# EAGLE board LinPsuv4 (EAGLE 7.5.0)
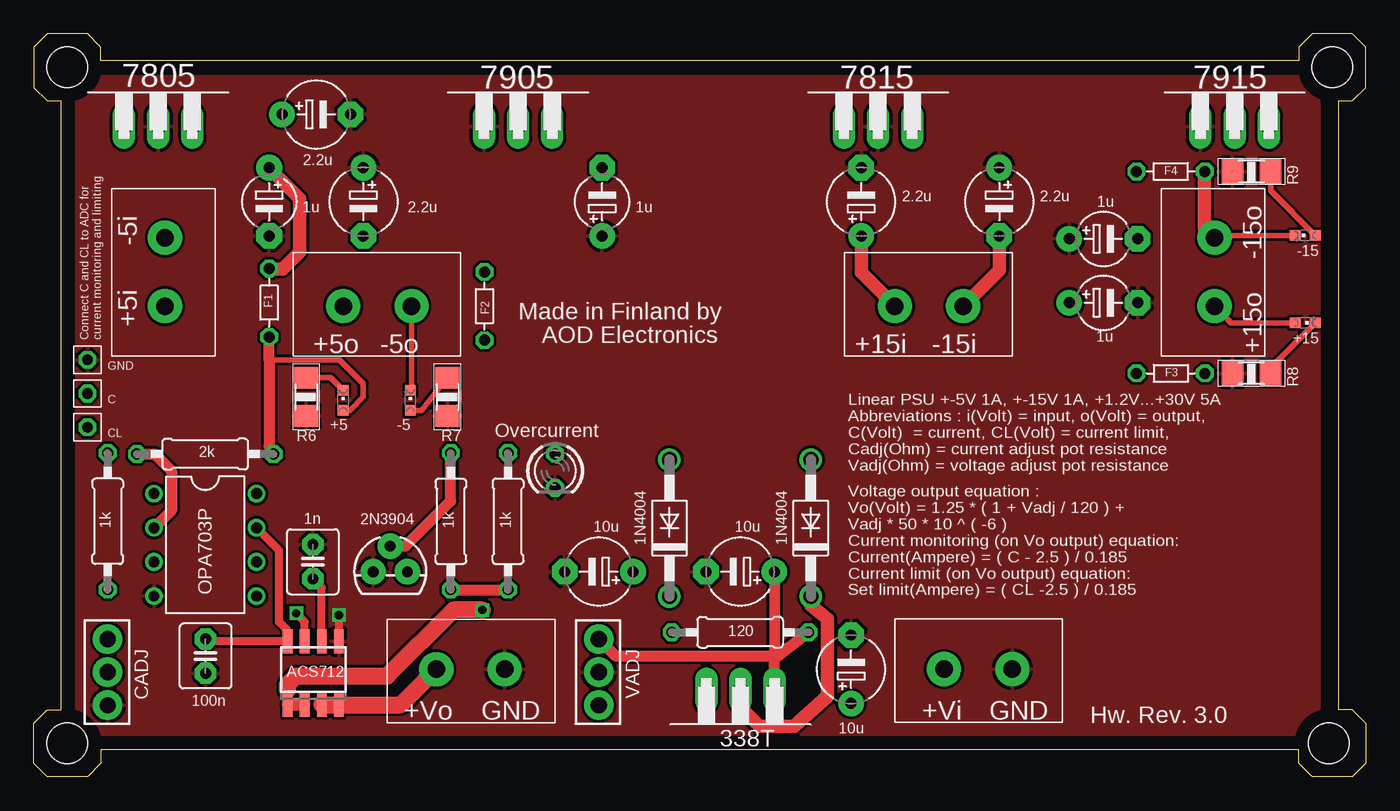
[diagram p0: board, top side]
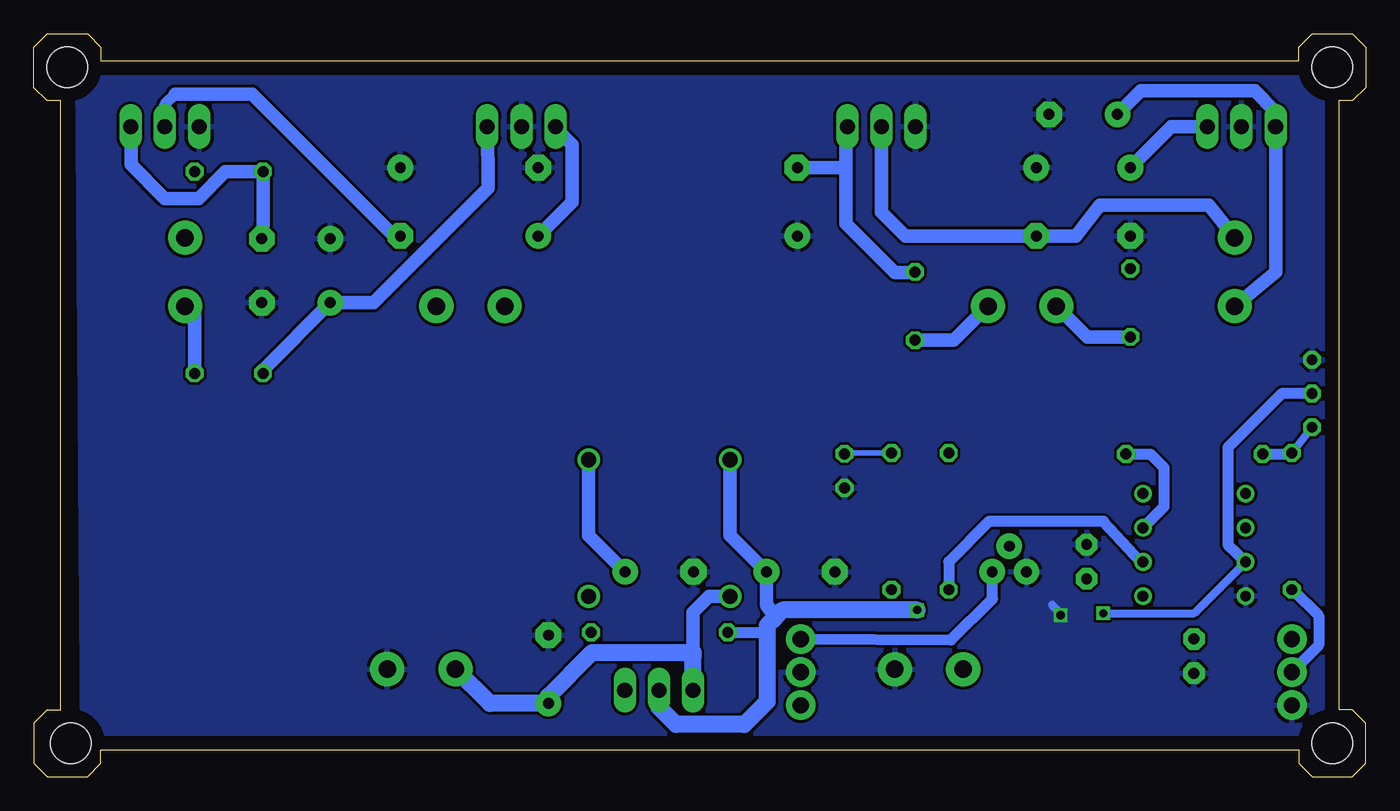
[diagram p1: board, bottom side, seen from below]

Size 99 x 55.25 mm. Coordinates in mm from the lower left corner, seen from the top.
Outline: 98,5 99,4 99,1 98,0 95,0 94,1 94,2 5,2 5,1 4,0 1,0 0,1 0,4 1,5 2,5 2,50.25 1,50.25 0,51.25 0,54.25 1,55.25 4,55.25 5,54.25 5,53.25 94,53.25 94,54.25 95,55.25 98,55.25 99,54.25 99,51.25 98,50.25 97,50.25 97,5 98,5
Copper layers (1*16): Top 0.035mm / dielectric 1.5mm / Bottom 0.035mm
Design rules "default": minimum track width 10mil, minimum drill 24mil, track to track 8mil, track to pad 8mil, pad to pad 8mil, via to via 8mil, smd to smd 8mil, copper to edge 40mil, drill to drill 8mil, minimum pad ring 10mil, minimum via ring 8mil, stop-mask expansion 4mil, vias tented up to drill 0mil, thermal gap 10mil
Holes 3 mm at 2.5,2.5 2.5,52.75 96.5,52.75 96.25,2.5

## Footprints (pad centres in the part's own frame; a part is rotated, then mirrored left to right if it is on the bottom)
TO-92 = drill 0.813 pad 1.88: 1 -1.27,0; 2 0,1.905; 3 1.27,0
TO220H = drill 1.118 long: 1 -2.54,-10.16; 2 0,-10.16; 3 2.54,-10.16
CHIPLED_0603 = smd 0.8 x 0.8: A 0,-0.75; C 0,0.75
E5-5 = drill 0.813 pad 1.905: + -2.54,0 | drill 0.813 pad 1.905 octagon: - 2.54,0
E5-4 = drill 0.813 pad 1.905: + -2.54,0 | drill 0.813 pad 1.905 octagon: - 2.54,0
C2.5-4 = drill 0.813 pad 1.6 octagon: 1 -1.27,0; 2 1.27,0
3RP/1610N = drill 1.2 pad 2.184: 1 -5,0; 2 -2.54,0; 3 -0.08,0
DO41-10 = drill 1.118: A 5.08,0; C -5.08,0
R-5 = drill 0.813 octagon: 1 -2.54,0; 2 2.54,0
SO08 = smd 0.72 x 1.78: 1 -1.905,-2.35; 2 -0.635,-2.35; 3 0.635,-2.35; 4 1.905,-2.35; 5 1.905,2.35; 6 0.635,2.35; 7 -0.635,2.35; 8 -1.905,2.35
DIL08 = drill 0.813 pad 1.27: 1 -3.81,-3.81; 2 -1.27,-3.81; 3 1.27,-3.81; 4 3.81,-3.81; 5 3.81,3.81; 6 1.27,3.81; 7 -1.27,3.81; 8 -3.81,3.81
1X2_5MM = drill 1.3 pad 2.54: IN1 0,0; IN2 5.08,0
LED3MM = drill 0.813 octagon: A -1.27,0; K 1.27,0
0207/10 = drill 0.813 octagon: 1 -5.08,0; 2 5.08,0
R1206 = smd 1.6 x 1.803: 1 -1.422,0; 2 1.422,0
DORU_CON_1X1 = drill 0.8 octagon: PIN1 0,0

## Placement (x,y rotation side)
2N3904  [TO-92]  26.5,15.25 0 top
7805  7805  [TO220H]  9.25,58.5 0 top
7815  7815T  [TO220H]  62.75,58.5 0 top
7905  [TO220H]  36,58.5 0 top
7915  [TO220H]  89.25,58.5 0 top
+5  [CHIPLED_0603]  23,28 0 top
+15  [CHIPLED_0603]  94.5,33.75 270 top
-5  [CHIPLED_0603]  28,28 0 top
-15  [CHIPLED_0603]  94.5,40.25 90 top
C1  2.2u  [E5-5]  24.5,42.75 270 top
C2  1u  [E5-4]  42.25,42.75 90 top
C3  2.2u  [E5-5]  21,49.25 0 top
C4  1u  [E5-4]  17.5,42.75 270 top
C5  2.2u  [E5-5]  71.75,42.75 270 top
C6  1u  [E5-4]  79.5,40 0 top
C7  2.2u  [E5-5]  61.5,42.75 90 top
C8  1u  [E5-4]  79.5,35.25 0 top
C9  10u  [E5-5]  52.5,15.25 180 top
C10  10u  [E5-5]  42,15.25 180 top
C11  10u  [E5-5]  60.75,8 90 top
C12  100n  [C2.5-4]  12.78,8.98 270 top
C13  1n  [C2.5-4]  20.75,16 90 top
CADJ  [3RP/1610N]  5.5,5.25 270 top
D1  1N4004  [DO41-10]  57.75,18.5 90 top
D2  1N4004  [DO41-10]  47.25,18.5 90 top
F1  THERMISTOR-5  [R-5]  17.5,35.25 270 top
F2  THERMISTOR-5  [R-5]  33.5,35 90 top
F3  THERMISTOR-5  [R-5]  84.5,30 0 top
F4  THERMISTOR-5  [R-5]  84.5,45 180 top
IC2  ACS712  [SO08]  20.78,7.71 0 top
IC3  338T  [TO220H]  52.53,-3.71 180 top
IC5  OPA703P  [DIL08]  12.75,17.25 270 top
IN5V  1X2_5MM  [1X2_5MM]  9.75,35 90 top
IN15V  1X2_5MM  [1X2_5MM]  64,35 0 top
LED1  [LED3MM]  38.75,22.75 270 top
OUT5V  1X2_5MM  [1X2_5MM]  23,35 0 top
OUT15V  1X2_5MM  [1X2_5MM]  87.75,35 90 top
R1  120  [0207/10]  52.5,10.75 180 top
R2  1k  [0207/10]  5.5,19 90 top
R3  2k  [0207/10]  12.75,24 0 top
R4  1k  [0207/10]  35.25,19 270 top
R5  1k  [0207/10]  31,19 270 top
R6  [R1206]  20.25,28.25 90 top
R7  [R1206]  30.75,28.25 90 top
R8  [R1206]  90.5,30 0 top
R9  [R1206]  90.5,45 0 top
U$1  C  [DORU_CON_1X1]  4,28.5 0 top
U$2  CL  [DORU_CON_1X1]  4,26 0 top
U$3  GND  [DORU_CON_1X1]  4,31 90 top
U$5  1X2_5MM  [1X2_5MM]  72.73,8.02 180 top
U$6  1X2_5MM  [1X2_5MM]  35,8 180 top
VADJ  [3RP/1610N]  42,5.25 270 top

## Library data of the parts
2N3904 = SparkFun-DiscreteSemi; PROD_ID: TRANS-08447
7805 7815 7905 7915 IC3 IC5 = linear
+5 +15 -5 -15 LED1 = led
C1-C11 = rcl
C12 C13 = capacitor-wima
CADJ VADJ = dorupot
D1 D2 = diode
F1-F4 = varistor
IC2 = ACS712
IN5V IN15V OUT5V OUT15V U$5 U$6 = doru_terminal_block
R1-R9 = eagle-ltspice; SPICEMODEL: NONE; SPICEPREFIX: R
U$1-U$3 = doru_con

## Nets
5VIN: 7805.1 C3.+ IN5V.IN1
5VOUT: +5.A C12.1 F1.2 IC2.8 IC5.7 OUT5V.IN1 R3.2
15VIN: 7815.1 C7.+ IN15V.IN1
15VOUT: +15.A F3.2 OUT15V.IN1
174243: 7915.3 C6.- F4.2
35353535: 7815.3 C8.+ F3.1
-5VIN: 7905.2 C1.- IN5V.IN2
-5VOUT: -5.C F2.1 OUT5V.IN2
-15VIN: 7915.2 C5.- IN15V.IN2
-15VOUT: -15.C F4.1 OUT15V.IN2
ADJ: 2N3904.3 C9.+ D1.A IC3.1 R1.1 VADJ.1
COUT: IC2.7 IC5.3 U$1.PIN1
CSET: IC5.2 R2.2 R3.1 U$2.PIN1
GND: 2N3904.1 7805.2 7815.2 7905.1 7915.1 C1.+ C2.+ C3.- C4.- C5.+ C6.+ C7.- C8.- C9.- C10.- C11.- C12.2 C13.2 CADJ.3 IC2.5 IC5.4 LED1.K R6.1 R7.1 R8.1 R9.1 U$3.PIN1 U$5.IN1 U$6.IN1 VADJ.2
N#%#: 7805.3 C4.+ F1.1
N$1: C11.+ D2.C IC3.3 U$5.IN2
N$2: +15.C R8.2
N$3: LED1.A R4.1
N$4: IC5.6 R4.2 R5.2
N$5: C13.1 IC2.6
N$6: IC2.3 IC2.4 U$6.IN2
N$7: +5.C R6.2
N$8: -15.A R9.2
N$9: CADJ.2 R2.1
N$11: 2N3904.2 R5.1
N$12: -5.A R7.2
R35353: 7905.3 C2.- F2.2
VOUTADJ: C10.+ D1.C D2.A IC2.1 IC2.2 IC3.2 R1.2

## Tracks (layer width: path | path; a pad name or v marks a point on that pad's centre or on a via)
5VIN
  Bottom 1.016: 18.46,49.54 C3.+ 16.71,51 8.25,51 6.75,49.5 6.75,48.38 7805.1 6.71,37.54 IN5V.IN1
5VOUT
  Top 0.406: +5.A 23.5,27.25 24.5,28.25 24.5,29.25 22.75,31 17.5,31
  Top 0.61: C12.1 12.96,10.06 IC2.8 18.88,10.89 18.24,11.53 18.24,16.86 IC5.7
  Top 0.813: F1.2 17.5,31 17.5,24.58 R3.2
  Bottom 0.813: 16.76,18.51 IC5.7 15,20.08 15,23 16,24 R3.2
  Bottom 1.016: F1.2 20.71,32.71 OUT5V.IN1
15VIN
  Top 1.016: 64.04,35.04 IN15V.IN1 61.5,37.5 C7.+
  Bottom 1.016: 7815.1 60.21,48.21 59,47 59,42.71 C7.+
15VOUT
  Top 0.406: +15.A 89,33.75 OUT15V.IN1
  Bottom 1.016: OUT15V.IN1 87.04,34.29 F3.2
174243
  Bottom 1.016: 7915.3 91.75,48.3 91.75,45.5 89.25,43 86.75,43 84.75,45 F4.2 81.96,41.1 C6.-
35353535
  Bottom 1.016: 7815.3 65.23,45.35 65.23,43.77 73.75,35.25 C8.+ 81.96,30.25 F3.1
-5VIN
  Bottom 0.813: 36,48.51 7905.2
  Bottom 1.016: IN5V.IN2 11.67,42.5 19.75,42.5 21.54,40.21 C1.- 34.21,40.21 36,42 7905.2
-5VOUT
  Top 0.406: -5.C 28.08,28.83 OUT5V.IN2
  Bottom 1.016: F2.1 30.62,32.46 OUT5V.IN2
-15VIN
  Top 1.016: C5.- 71.75,37.67 IN15V.IN2
  Bottom 0.813: 7915.2 89.25,50 88.5,50.75
  Bottom 1.016: 88.5,50.75 82.75,50.75 72.21,40.21 C5.-
-15VOUT
  Top 0.406: -15.C 87.92,40.25 OUT15V.IN2
  Top 1.016: F4.1 87,44.96 87,40.83 OUT15V.IN2
ADJ
  Top 0.813: IC3.1 55.07,8.93 | 55.07,8.93 55.24,8.93 55.31,9 | 55.31,9 R1.1 | C9.+ 55.07,8.93 | 55.31,9 43.25,9 VADJ.1
  Bottom 0.813: VADJ.1 30.82,10.18 27.75,13.25 27.75,15.23 2N3904.3
  Bottom 1.016: D1.A 57.75,17.96 C9.+
COUT  (via drill 0.6)
  Top 0.61: IC2.7 20.14,11.53 v19.51,12.16
  Bottom 0.61: v19.51,12.16 12.75,12.16 IC5.3
  Bottom 0.813: IC5.3 10.25,17.25 10.25,24.5 6.25,28.5 U$1.PIN1
CSET
  Top 0.813: R3.1 9,24 10.25,22.75 10.25,19.8 IC5.2
  Bottom 0.61: U$2.PIN1 R2.2
  Bottom 0.813: R3.1 5.58,24 R2.2
GND  (via drill 0.6)
  Top 0.61: IC2.5 v22.68,12.03
  Bottom 0.61: v22.68,12.03 22.68,12.16 23.32,12.79
  pour Bottom: 3.13,2.5 95.34,2.5 95.71,52.38 3,52.38
  pour Top: 3,52.25 95.5,52.25 95.5,2.5 3,2.5
N#%#
  Top 1.016: C4.+ 17.5,45.25 19.75,43 19.75,39 18.5,37.75 17.54,37.75 F1.1
  Bottom 1.016: 7805.3 14.45,48.34 C4.+
N$1
  Bottom 1.016: D2.C 48.83,13.42 50,12.25 50,9.25
  Bottom 1.27: IC3.3 49.99,8.98 50,8.99 50,9.25 57.5,9.25 60.75,6 C11.+ 65.09,5.46 U$5.IN2
N$2
  Top 0.406: +15.C 92,30.5 R8.2
N$3
  Bottom 0.406: R4.1 38.69,24.08 LED1.A
N$4
  Top 0.813: R5.2 R4.2
  Bottom 0.813: IC5.6 16.72,15.97 19.5,19 28,19 31,16 R5.2
N$5
  Top 0.61: IC2.6 21.41,14.06 C13.1
N$6
  Top 1.27: IC2.3 IC2.4 27.29,5.37 U$6.IN2
N$7
  Top 0.406: R6.2 22.08,29.67 +5.C
N$8
  Top 0.406: R9.2 91.92,43.58 -15.A
N$9
  Bottom 0.813: 5.58,13.92 R2.1 5.42,13.92 3.5,12 3.5,9.79 CADJ.2
N$11
  Top 0.813: R5.1 31,20.5 27.66,17.16 2N3904.2
N$12
  Top 0.406: -5.A 28.83,27.25 R7.2
R35353
  Bottom 0.813: 38.63,48.25 7905.3
  Bottom 1.016: 38.63,48.25 38.63,45.5 | 38.63,45.5 38.63,45.25 | 38.67,45.54 38.63,45.5 | C2.- 38.67,45.29 38.63,45.25 | 38.63,45.25 38.63,41.13 35,37.5 33.54,37.5 F2.2
VOUTADJ  (via drill 0.6)
  Top 0.61: IC2.1 18.88,6.45
  Top 0.813: IC2.1 IC2.2
  Top 1.016: D1.C 57.75,12.75 59,11.75 59,6 56.5,3.75 53.95,3.75 52.53,5.17 IC3.2
  Top 1.27: 18.88,6.45 18.88,6.88 19.5,7.5 26.28,7.5 31.19,12.41 v33.34,12.41
  Bottom 0.813: R1.2 44.5,10.75
  Bottom 1.016: D2.A 47.25,17.96 C10.+ 44.54,12.79 43.88,11.88
  Bottom 1.27: IC3.2 52.53,5.17 51.26,3.9 46.18,3.9 44.5,5.58 44.5,10.75 44.5,11.25 43.88,11.88 43.34,12.41 v33.34,12.41

## Text on the board
tPlace: Made in Finland by | AOD Electronics | Voltage output equation : / Vo(Volt) = 1.25 * ( 1 + Vadj / 120 ) + / Vadj * 50 * 10 ^ ( -6 ) / Current monitoring (on Vo output) equation: / Current(Ampere) = ( C - 2.5 ) / 0.185 / Current limit (on Vo output) equation: / Set limit(Ampere) = ( CL -2.5 ) / 0.185
tNames: -5i | -15o | +5i | Connect C and CL to ADC for / current monitoring and limiting | +5o | -5o | +15i | -15i | +15o | Overcurrent | Linear PSU +-5V 1A, +-15V 1A, +1.2V...+30V 5A / Abbreviations : i(Volt) = input, o(Volt) = output, / C(Volt) = current, CL(Volt) = current limit, / Cadj(Ohm) = current adjust pot resistance / Vadj(Ohm) = voltage adjust pot resistance | +Vo | GND | +Vi | GND | Hw. Rev. 3.0